# Altium PCB PCB1.PcbDoc
Units mm, origin at the board's own origin, x right, y up, seen from the top; angles counter-clockwise.
Board outline 41.68 x 53.8 mm, 2 copper layers (Top Layer, Bottom Layer); 7 components, 5 nets, 20 pads, 0 vias.
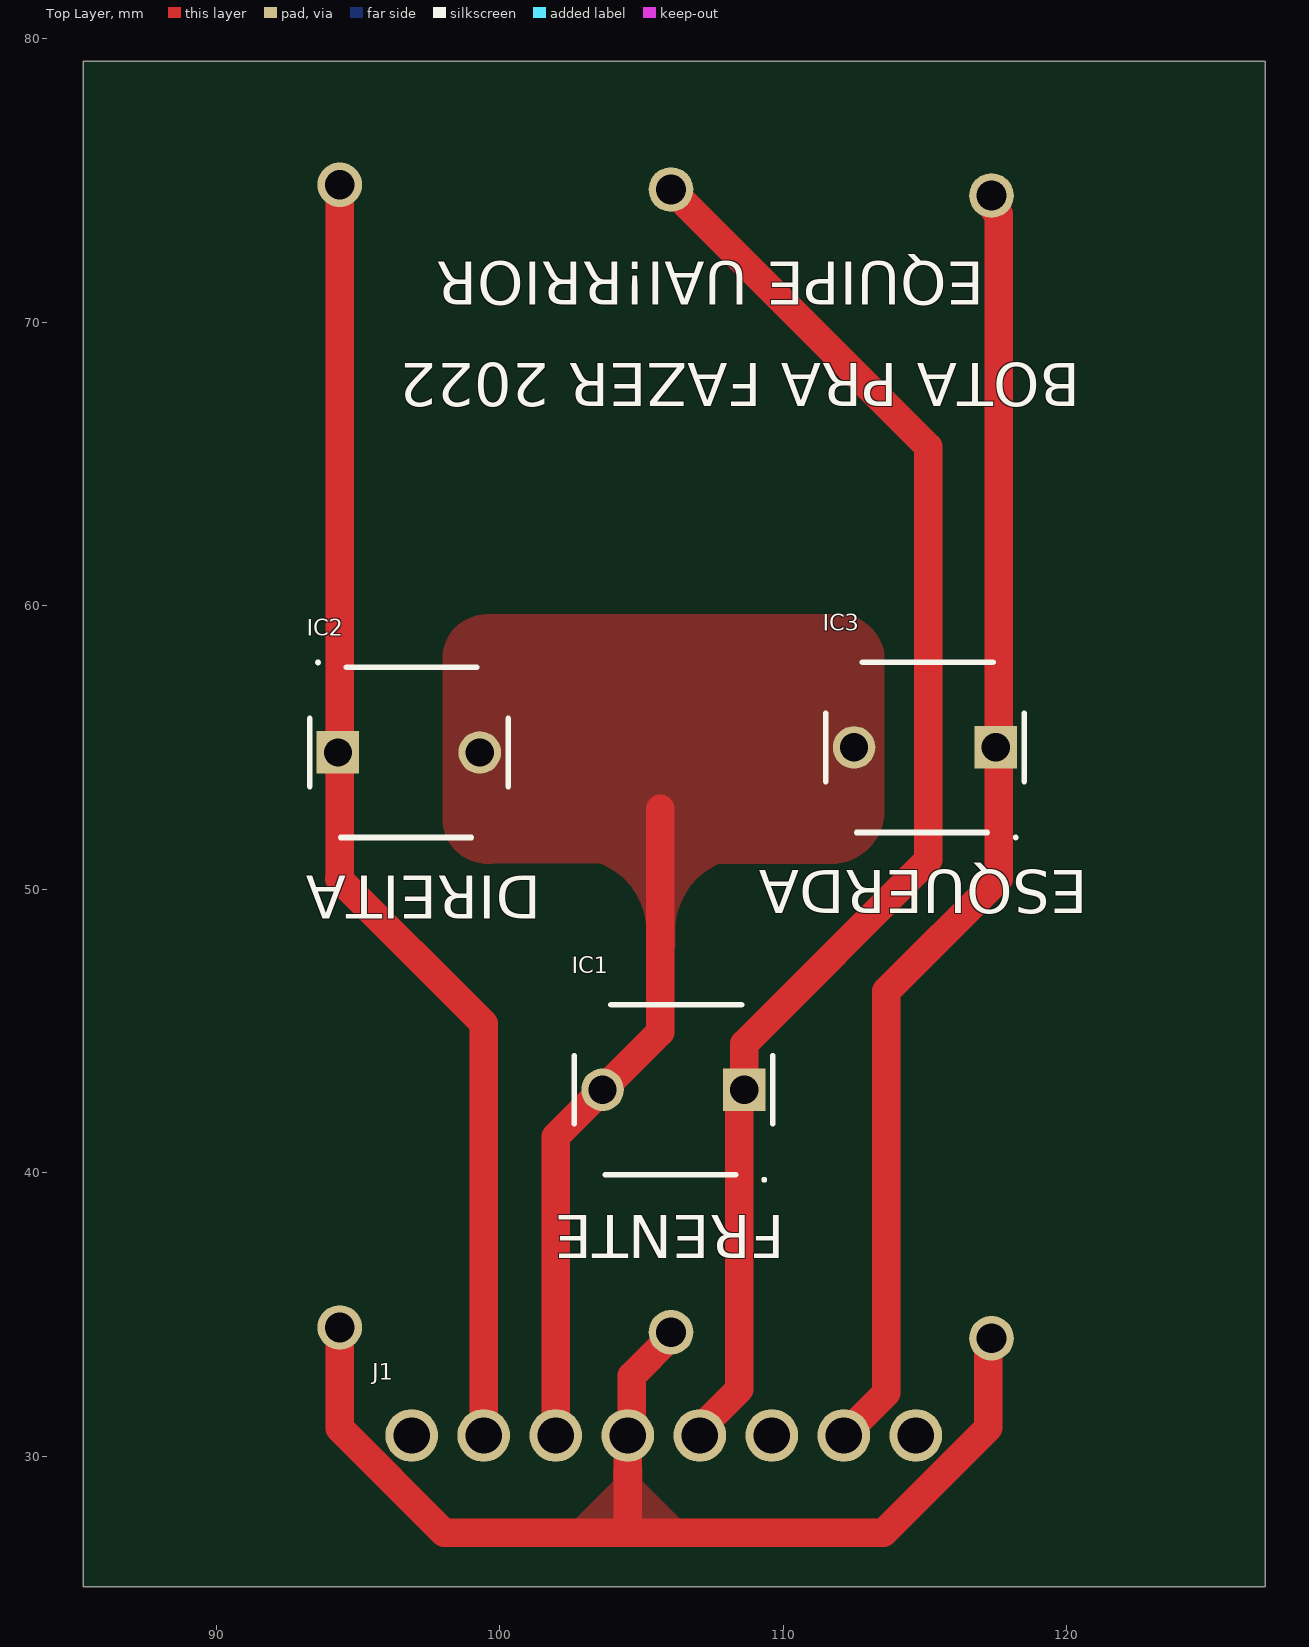
[diagram p0: Top Layer view]
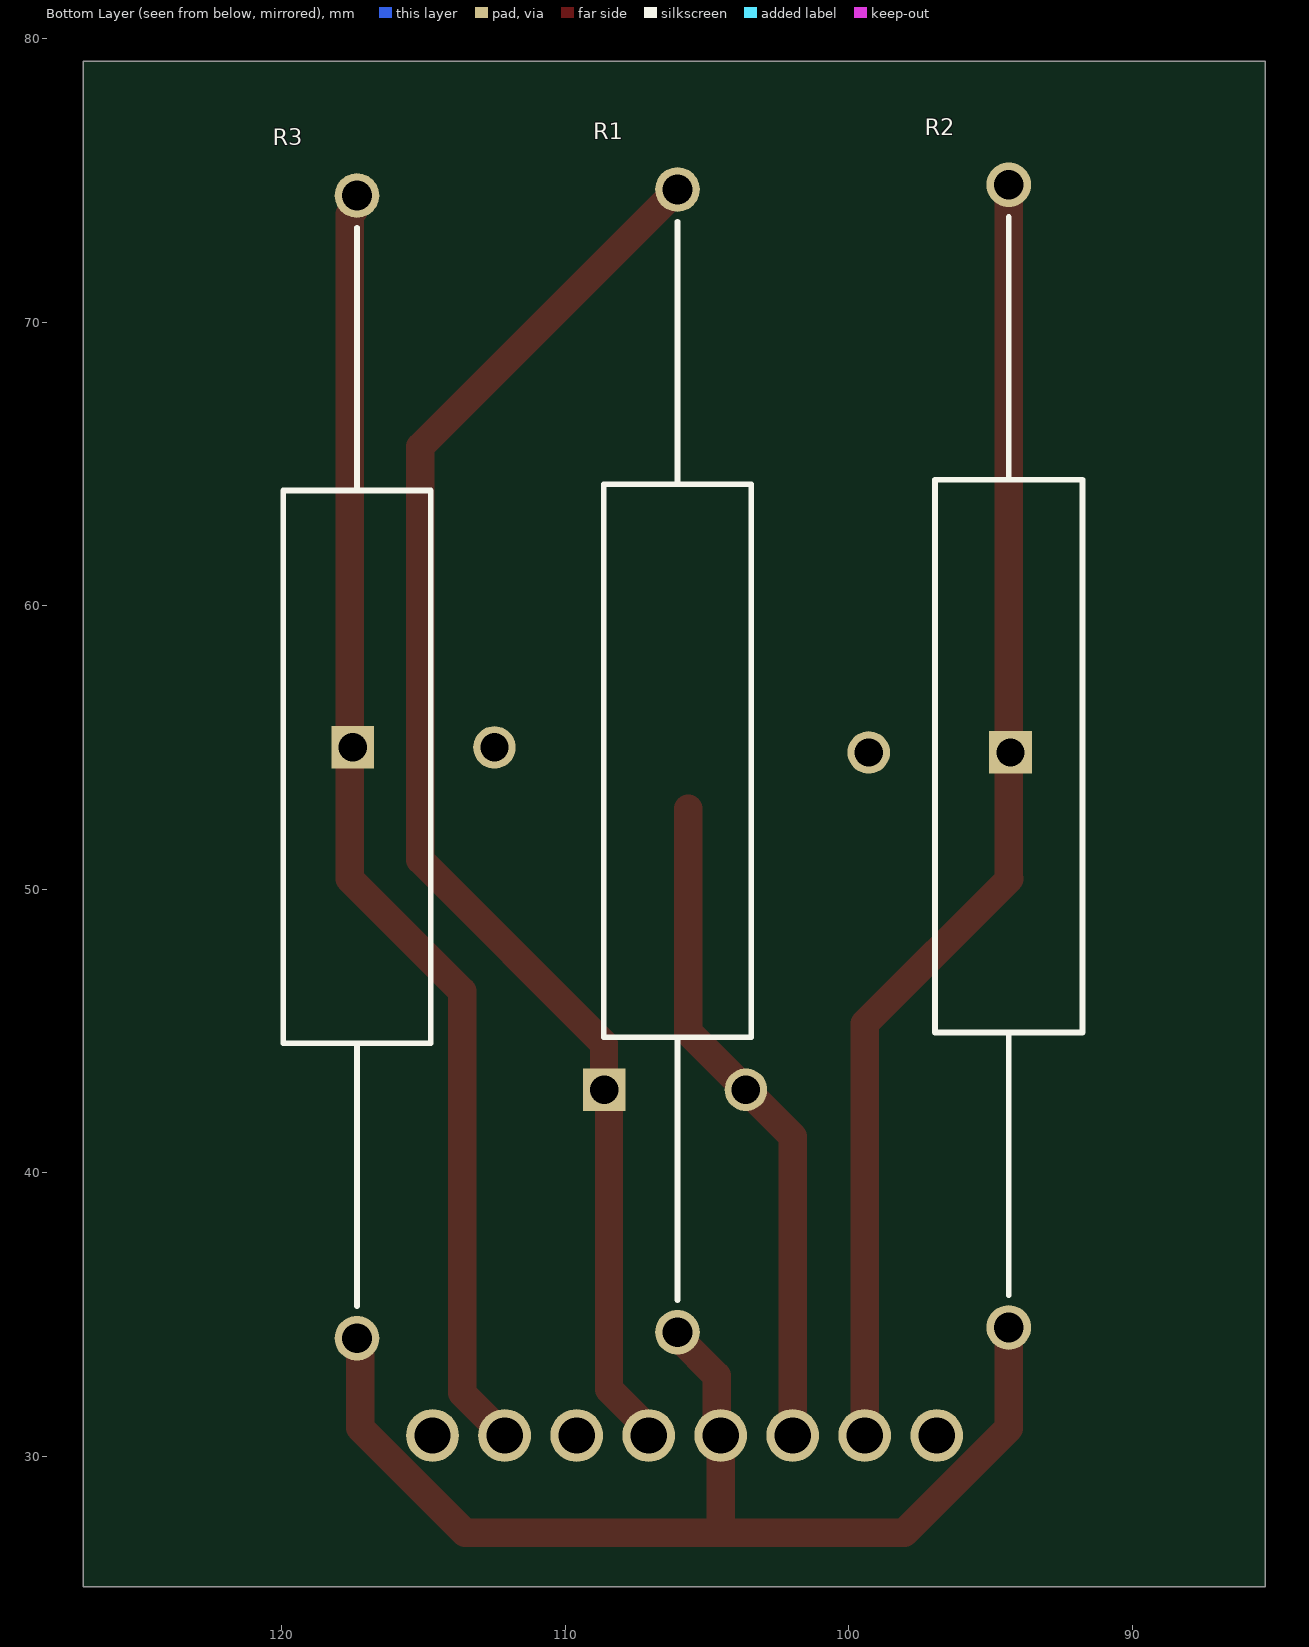
[diagram p1: Bottom Layer view, seen from below]
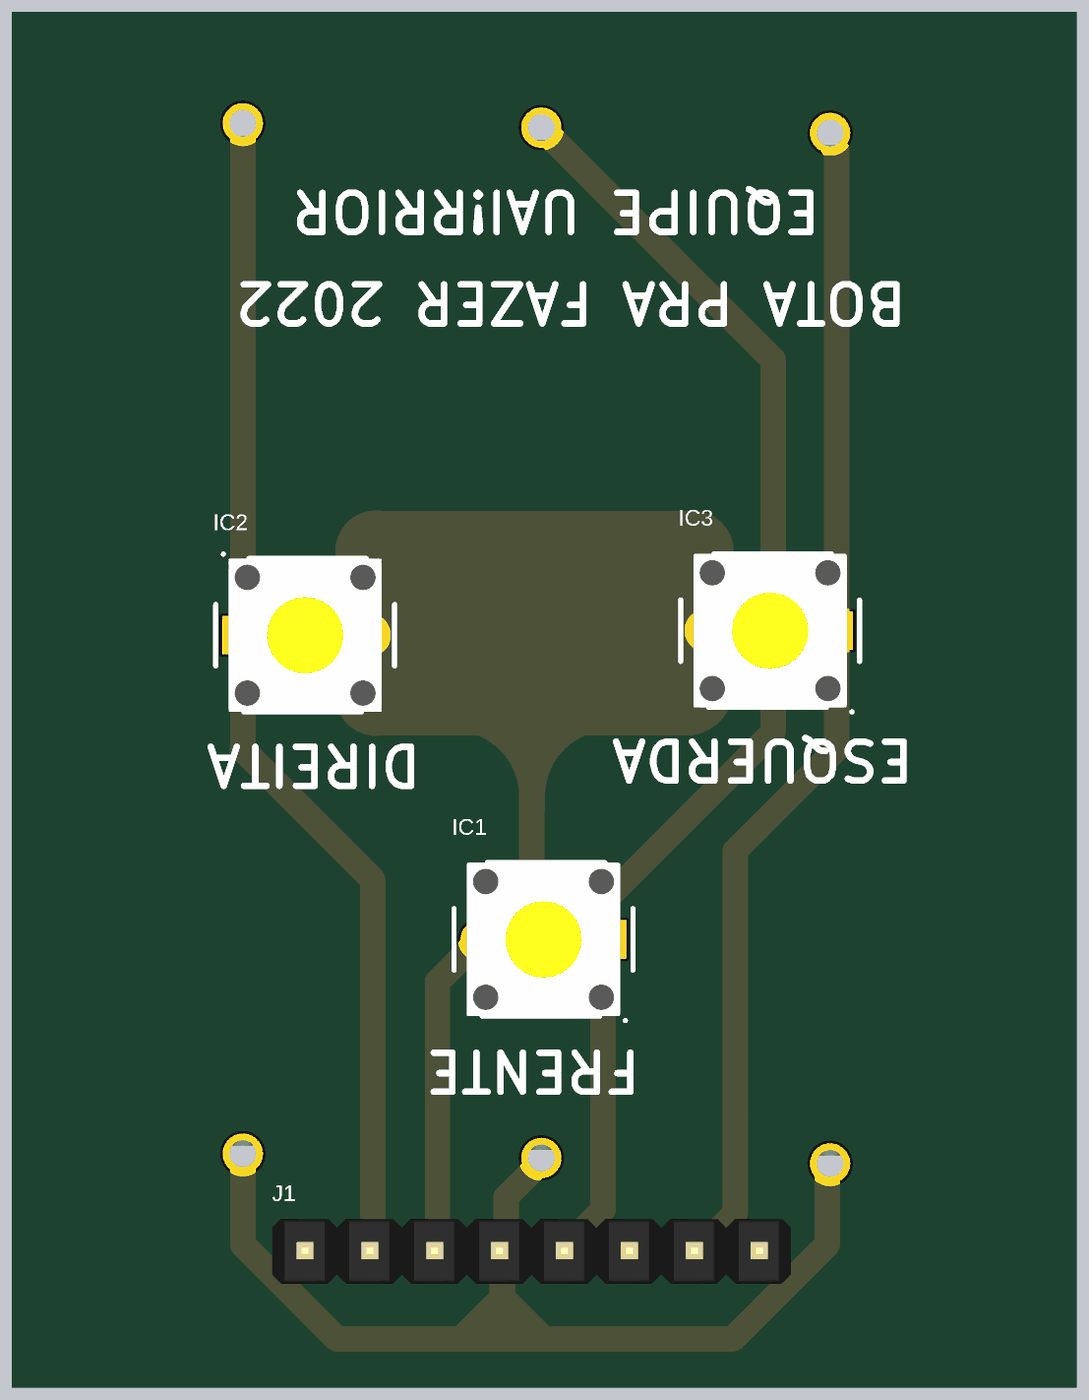
[diagram p2: 3D render of the assembled board from above, using the file's embedded part models]
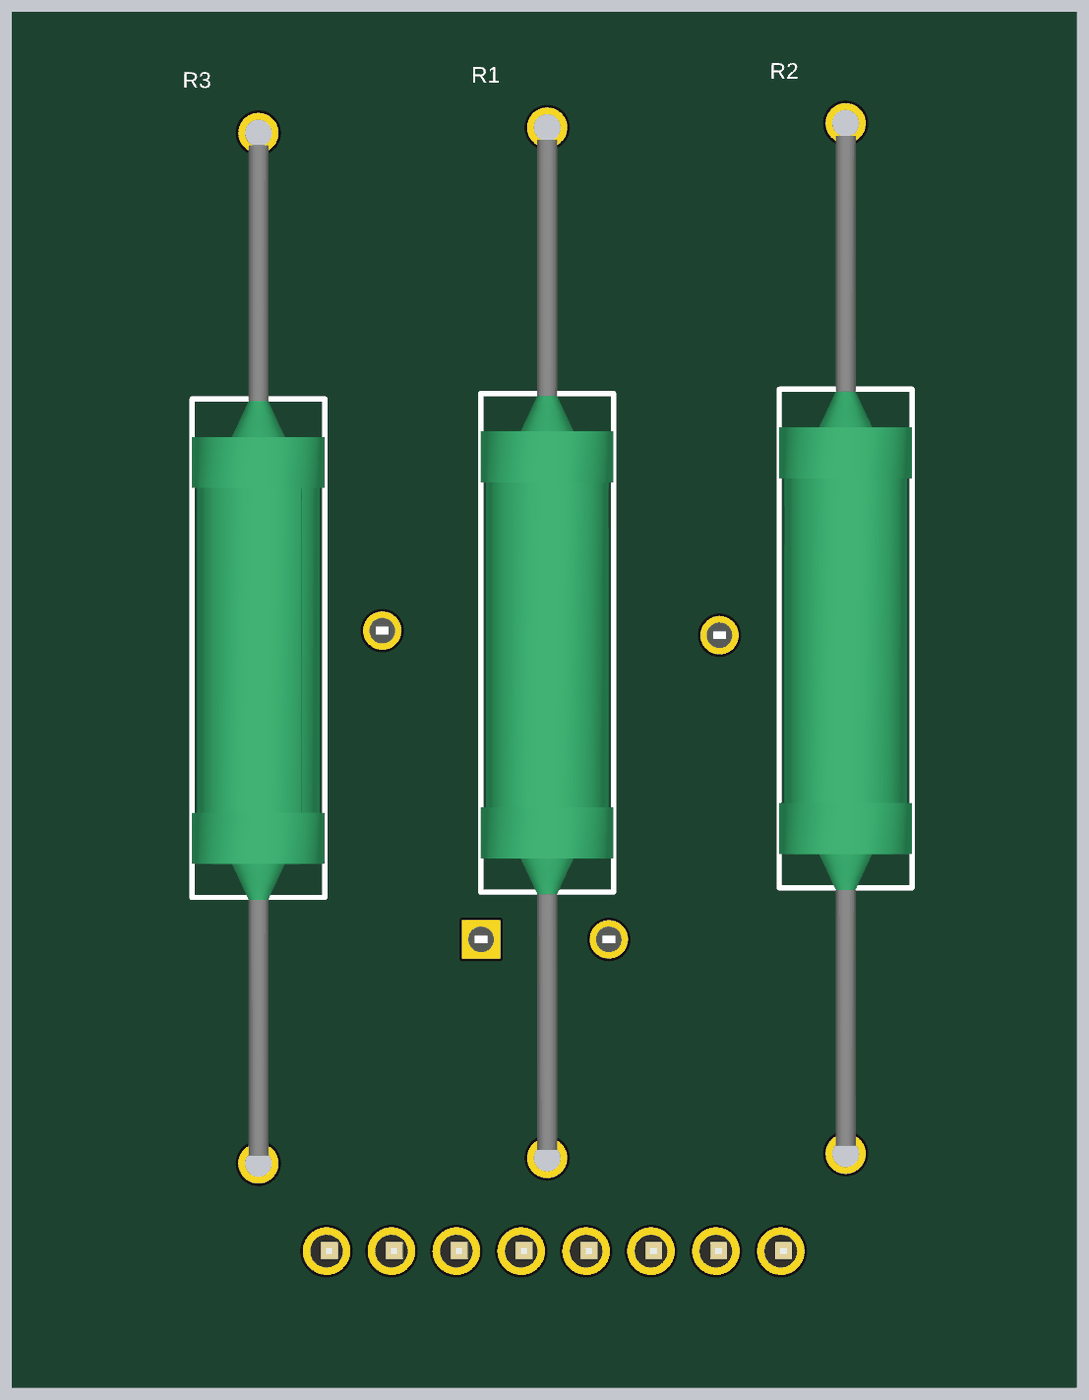
[diagram p3: 3D render of the assembled board from below, using the file's embedded part models]

## Layer stack, top to bottom
Top Solder: solder mask 0.0102, Solder Resist, Dk 3.5
Top Layer: signal copper 0.0356
Dielectric 1: dielectric 0.32, FR-4, Dk 4.8
Bottom Layer: signal copper 0.0356
Bottom Solder: solder mask 0.0102, Solder Resist, Dk 3.5

## Board outline
85.319,25.4 127,25.4 127,79.197 85.319,79.197

## Design rules (kind name [scope] priority, off if disabled: settings)
Clearance [All] p1: gap=0.254 ignorepadtopadclearanceinfootprint=FALSE except(0: Arc-Hole Track-Hole SMDPad-Hole THPad-Hole Via-Hole Fill-Hole Poly-Hole Region-Hole Text-Hole)
PolygonConnect [All] p1: connectstyle=Direct reliefconductorwidth=0.254 reliefentries=4 polygonreliefangle="90 Angle" airgapwidth=0.254
RoutingVias [All] p1: holewidth=0.711 width=1.27 viastyle="Through Hole" minholewidth=0.711 minwidth=1.27 maxholewidth=0.711 maxwidth=1.27
SolderMaskExpansion [All] p1: expansion=0.102 istentingtop=FALSE
Width [All] p1: maxlimit=1 minlimit=0.254 preferedwidth=0.254 bottomlayer_maxwidth=0.254 minimp=50.000000 maximp=50.000000 favimp=50.000000
30 further rules are at their usual default settings.

## Components (designator, comment, footprint, x,y, rotation, side; value= is the part's Value field where it differs from the comment)
IC1 "Push buttom TH - 2 pin" "BUTTON - TH - 2PIN" 109.132,39.926 r180 top
IC2 "Push buttom TH - 2 pin" "BUTTON - TH - 2PIN" 93.8,57.822 r0 top
IC3 "Push buttom TH - 2 pin" "BUTTON - TH - 2PIN" 118,52 r180 top
J1 "Male Header 8" "MALE HEADER 8" 114.681,30.734 r180 top
R1 "100 R" RESISTOR_THROUGH_HOLE 106.045,34.376 r90 bottom
R2 "100 R" RESISTOR_THROUGH_HOLE 94.361,34.544 r90 bottom
R3 "100 R" RESISTOR_THROUGH_HOLE 117.348,34.163 r90 bottom

## Footprints (in the part's own frame and the unit in brackets; to place one, negate y for a bottom-side part, rotate by r counter-clockwise, add the part's x,y. Pads: shape width x height; smd on the part's side, far side on the other; paste and mask are expansions set on the pad)
"BUTTON - TH - 2PIN" [mm]
  rect 1.5x1.5 hole 1: 1(0.5,-3)
  round 1.5 hole 1: 2(5.5,-3)
  silkscreen extent -0.5,-6 6.5,0.23, body extent 0,-6 6,0, height 4.2
"MALE HEADER 8" [mm]
  round 1.86 hole 1.28: PIN1(0,0) PIN2(2.54,0) PIN3(5.08,0) PIN4(7.62,0) PIN5(10.16,0) PIN6(12.7,0) PIN7(15.24,0) PIN8(17.78,0)
  body extent -1.14,-1.27 19.18,1.27, height 9.2
RESISTOR_THROUGH_HOLE [mm]
  round 1.575 hole 1.05: 1(0,0) 2(40.3,0)
  silkscreen extent 1.14,-2.6 39.16,2.6, body extent 0.32,-2.59 39.82,2.59, height 5.2

## Part data
IC1 IC2 IC3: "Push buttom true hole with 2 pin", Manufacturer_Name="CUI Inc.", Manufacturer_Part_Number=TS02-66-90-BK-100-SCR-D, ComponentLink1Description=Datasheet, ComponentLink1URL=https://www.gravitech.us/mipubusw2qt4.html, Height=9.2mm
R1 R2 R3: library part PR03000201000JAC00, "RES PTH 100 OHM 5% 3W", Manufacturer="Vishay / BC Components", Operating Temperature="- 55°C ~ 155°C", Package / Case="Ammo Pack", Power Rating="3 W", Resistor Type=Fixed, Supplier Part Number 1=594-5093NW100R0J, Temperature Coefficient="250 PPM / C", Tolerance="5 %", Voltage Rating="750 V", Category="Metal Film Resistors - Through Hole", ComponentLink1Description="Mouser Link", ComponentLink1URL=https://br.mouser.com/ProductDetail/Vishay-BC-Components/PR03000201000JAC00/?qs=HbLW8Yl3MFzoQdcSX5YM3A%3D%3D, ComponentLink2Description=Datasheet, ComponentLink2URL=https://br.mouser.com/datasheet/2/427/pr010203-1762580.pdf, Library Control - Checked Footprint=Yes, Library Control - Checked Schematic=Yes, Library Control - Last Update="27/06/2021 20:43", Library Control - Person that Checked Footprint=Nikaum, Library Control - Person that Checked Schematic=Nikaum, Library Control - Person that did the Last Update Footprint=Nikaum, Library Control - Person that did the Last Update Schematic=Nikaum, Library Ref=Resistor, Part Number=PR03000201000JAC00, Price="1 = 0,53, 100 = 0,286 (USD)", Size / Dimension="5,20 D x 16,70 L x 0,78 LD", Supplier 1=Mouser
J1: Library Control - Person that did the Last Update Schematic=Marcos, Library Control - Persont that did the Last Update Footprint=Marcos, Library Ref=Header, Number of Contacts=8, System=Connector

## Nets (pads, with @x,y where several pads share a name; then routed paths per layer and width w, separated by ;. In a path a pad name is that pad's centre, name@x,y a point inside that pad or via, vN(x,y) a via of type N, cw(c..) or ccw(c..) an arc to the next point about the centre after c; other vN are vias at no path point)
5V: IC1.2 IC2.2 IC3.2 J1.PIN6 | length 23.6
  Top Layer w1: J1.PIN6 101.981,41.275 IC1.2 105.664,44.958 105.664,52.832
DIREITA: IC3.1 J1.PIN2 R3.2 | length 46.1
  Top Layer w1: J1.PIN2 113.64,32.233 113.64,46.402 117.602,50.364 117.602,51.387 117.602,57.887 117.602,73.802 117.458,73.946 117.458,74.353 R3.2
ESQUERDA: IC1.1 J1.PIN4 R1.2 | length 51
  Top Layer w1: R1.2 115.113,65.608 115.113,51.029 108.634,44.549 108.634,43.176 108.458,43 108.458,32.364 107.061,30.967 J1.PIN4
FRENTE: IC2.1 J1.PIN7 R2.2 | length 46.2
  Top Layer w1: R2.2 94.361,50.387 cw(c94.338,50.387) 94.338,50.364 99.441,45.261 J1.PIN7
GND: J1.PIN5 R1.1 R2.1 R3.1 | length 40.1
  Top Layer w1: R2.1 94.361,30.988 98.044,27.305 104.521,27.305 105.514,27.305 113.538,27.305 117.238,31.005 117.238,34.053 R3.1 ; 104.521,27.559 J1.PIN5 104.66,30.873 104.66,32.835 106.045,34.22 R1.1
pads on no net: J1.PIN1 J1.PIN3 J1.PIN8

## Polygon pours and split planes (outlines as drawn)
5V on Top Layer (solid, pour order 10): 107.768,50.902 111.708,50.902 ccw(c111.709,52.755) 111.709,50.902 ccw(c111.709,52.755) 113.563,52.755 ccw(c111.709,52.755) 113.563,52.756 113.563,58.293 ccw(c111.938,58.066) 111.938,59.706 ccw(c111.938,58.066) 111.708,59.69 99.77,59.69 ccw(c99.58,58.102) 99.58,59.701 ccw(c99.58,58.102) 97.992,58.293 97.992,52.324 ccw(c99.593,52.502) 99.593,50.892 ccw(c99.593,52.502) 99.77,50.902 103.558,50.902 cw(c102.637,48.535) 105.177,48.535 105.177,47.943 106.193,47.943 106.193,48.552 cw(c108.733,48.552)
GND on Top Layer "GND_L01_P002" (solid, pour order 2): 104.008,29.621 104.008,29.113 102.357,27.462 106.675,27.462 105.024,29.113 105.024,29.621

## Silkscreen, mask and mechanical layers (free items; w line width, h text height)
Top Overlay:
  text "EQUIPE UAI!RRIOR" at 117.094,72.136 h1.52 r180
  text "BOTA PRA FAZER 2022" at 120.472,68.555 h1.52 r180
  text "ESQUERDA" at 120.752,50.673 h1.52 r180
  text "DIREITA" at 101.473,50.47 h1.52 r180
  text "FRENTE" at 110.058,38.506 h1.52 r180